# Altium PCB PCB1.PcbDoc
Units mm, origin at the board's own origin, x right, y up, seen from the top; angles counter-clockwise.
Board outline 70 x 70 mm, 2 copper layers (Top Layer, Bottom Layer); 15 components, 11 nets, 44 pads, 21 vias.
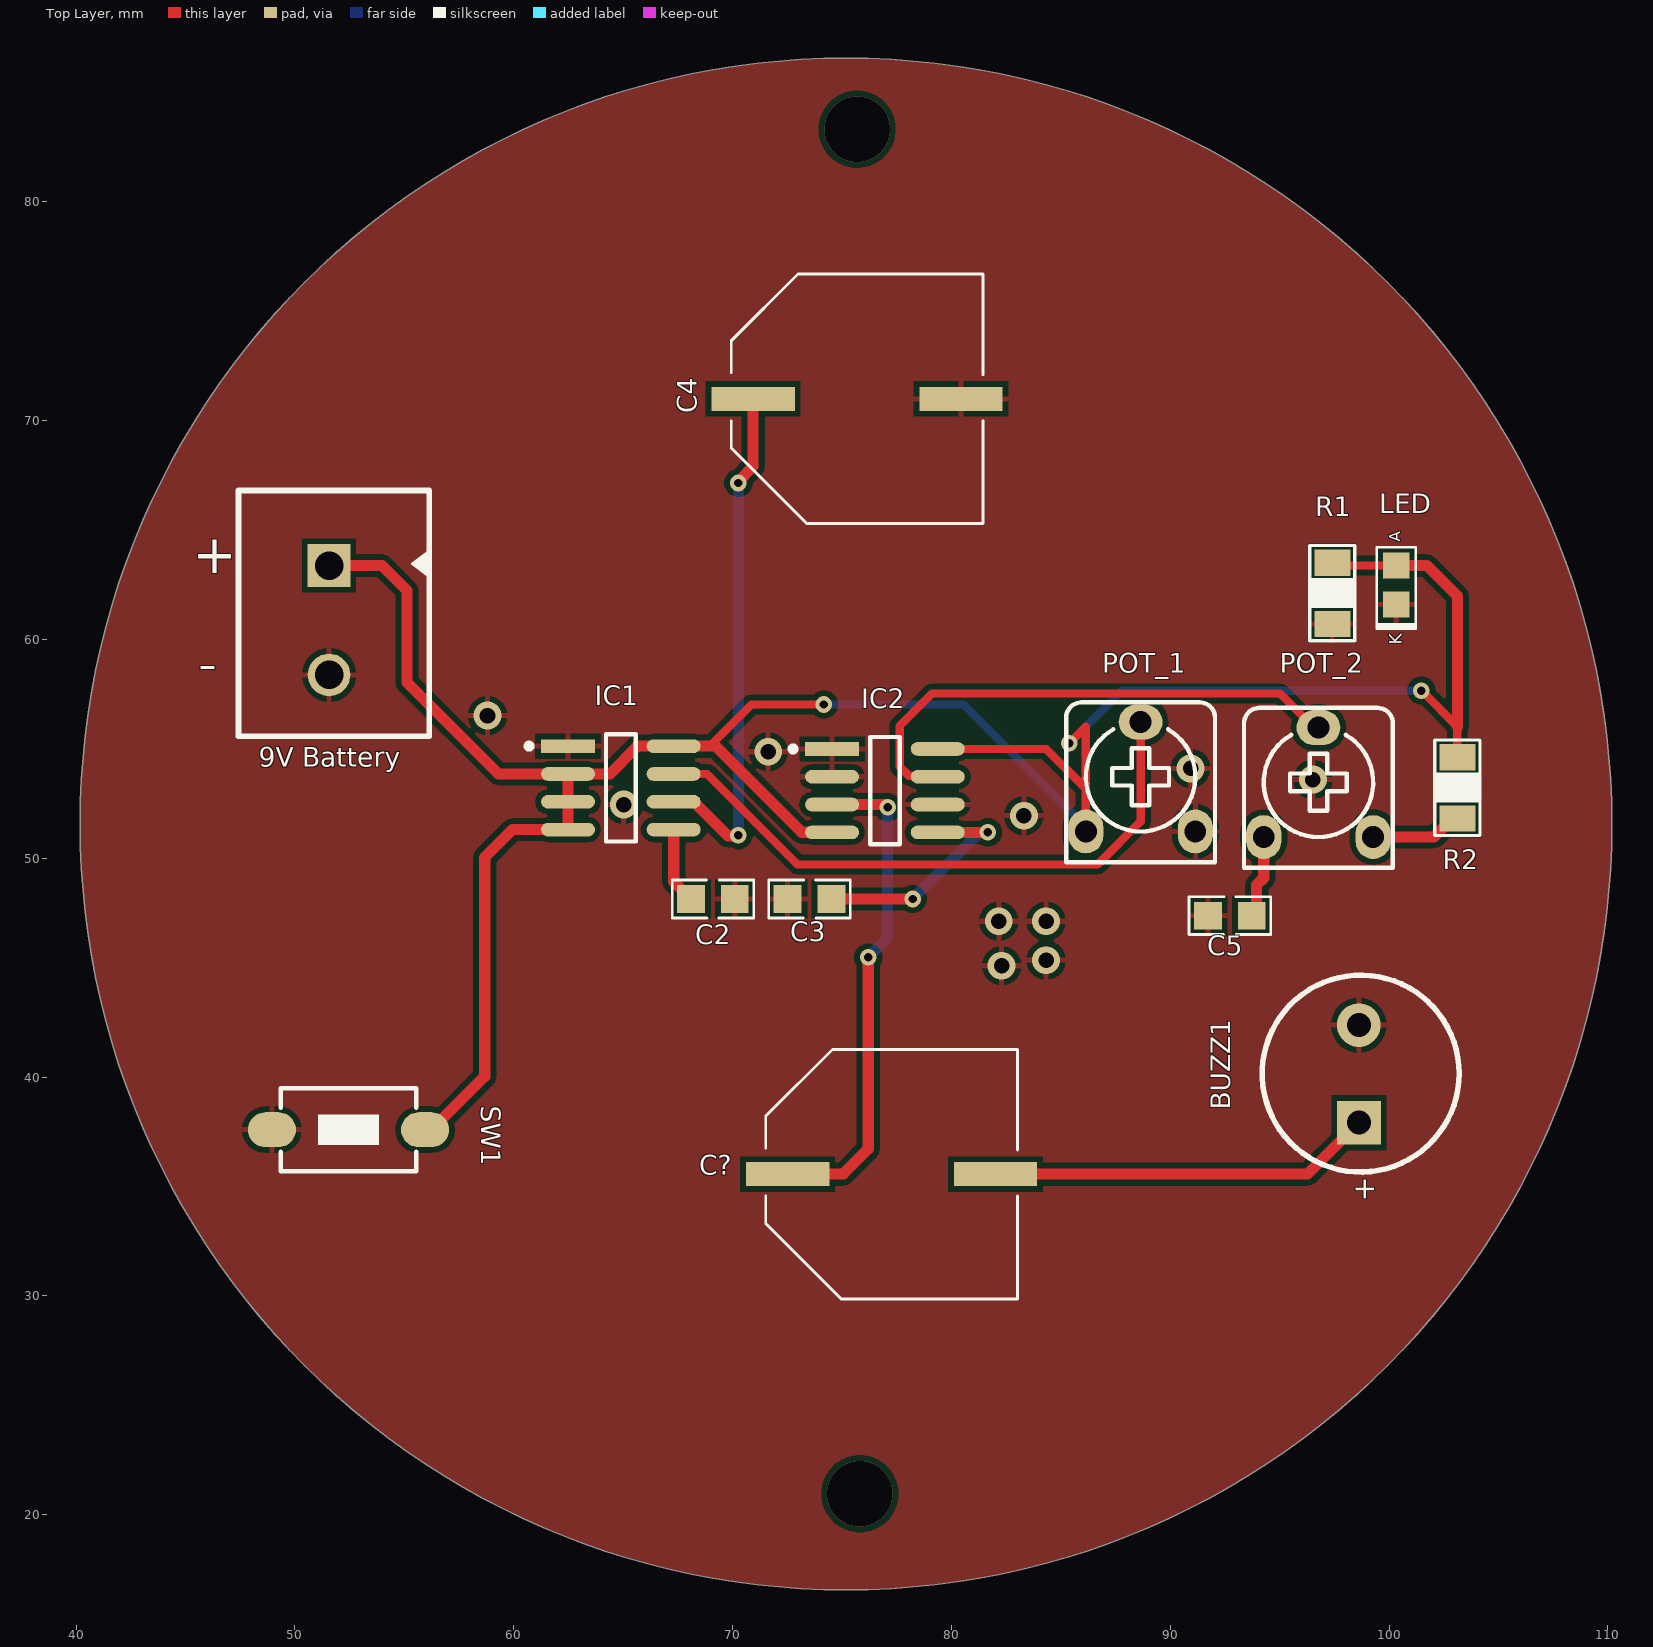
[diagram p0: Top Layer view]
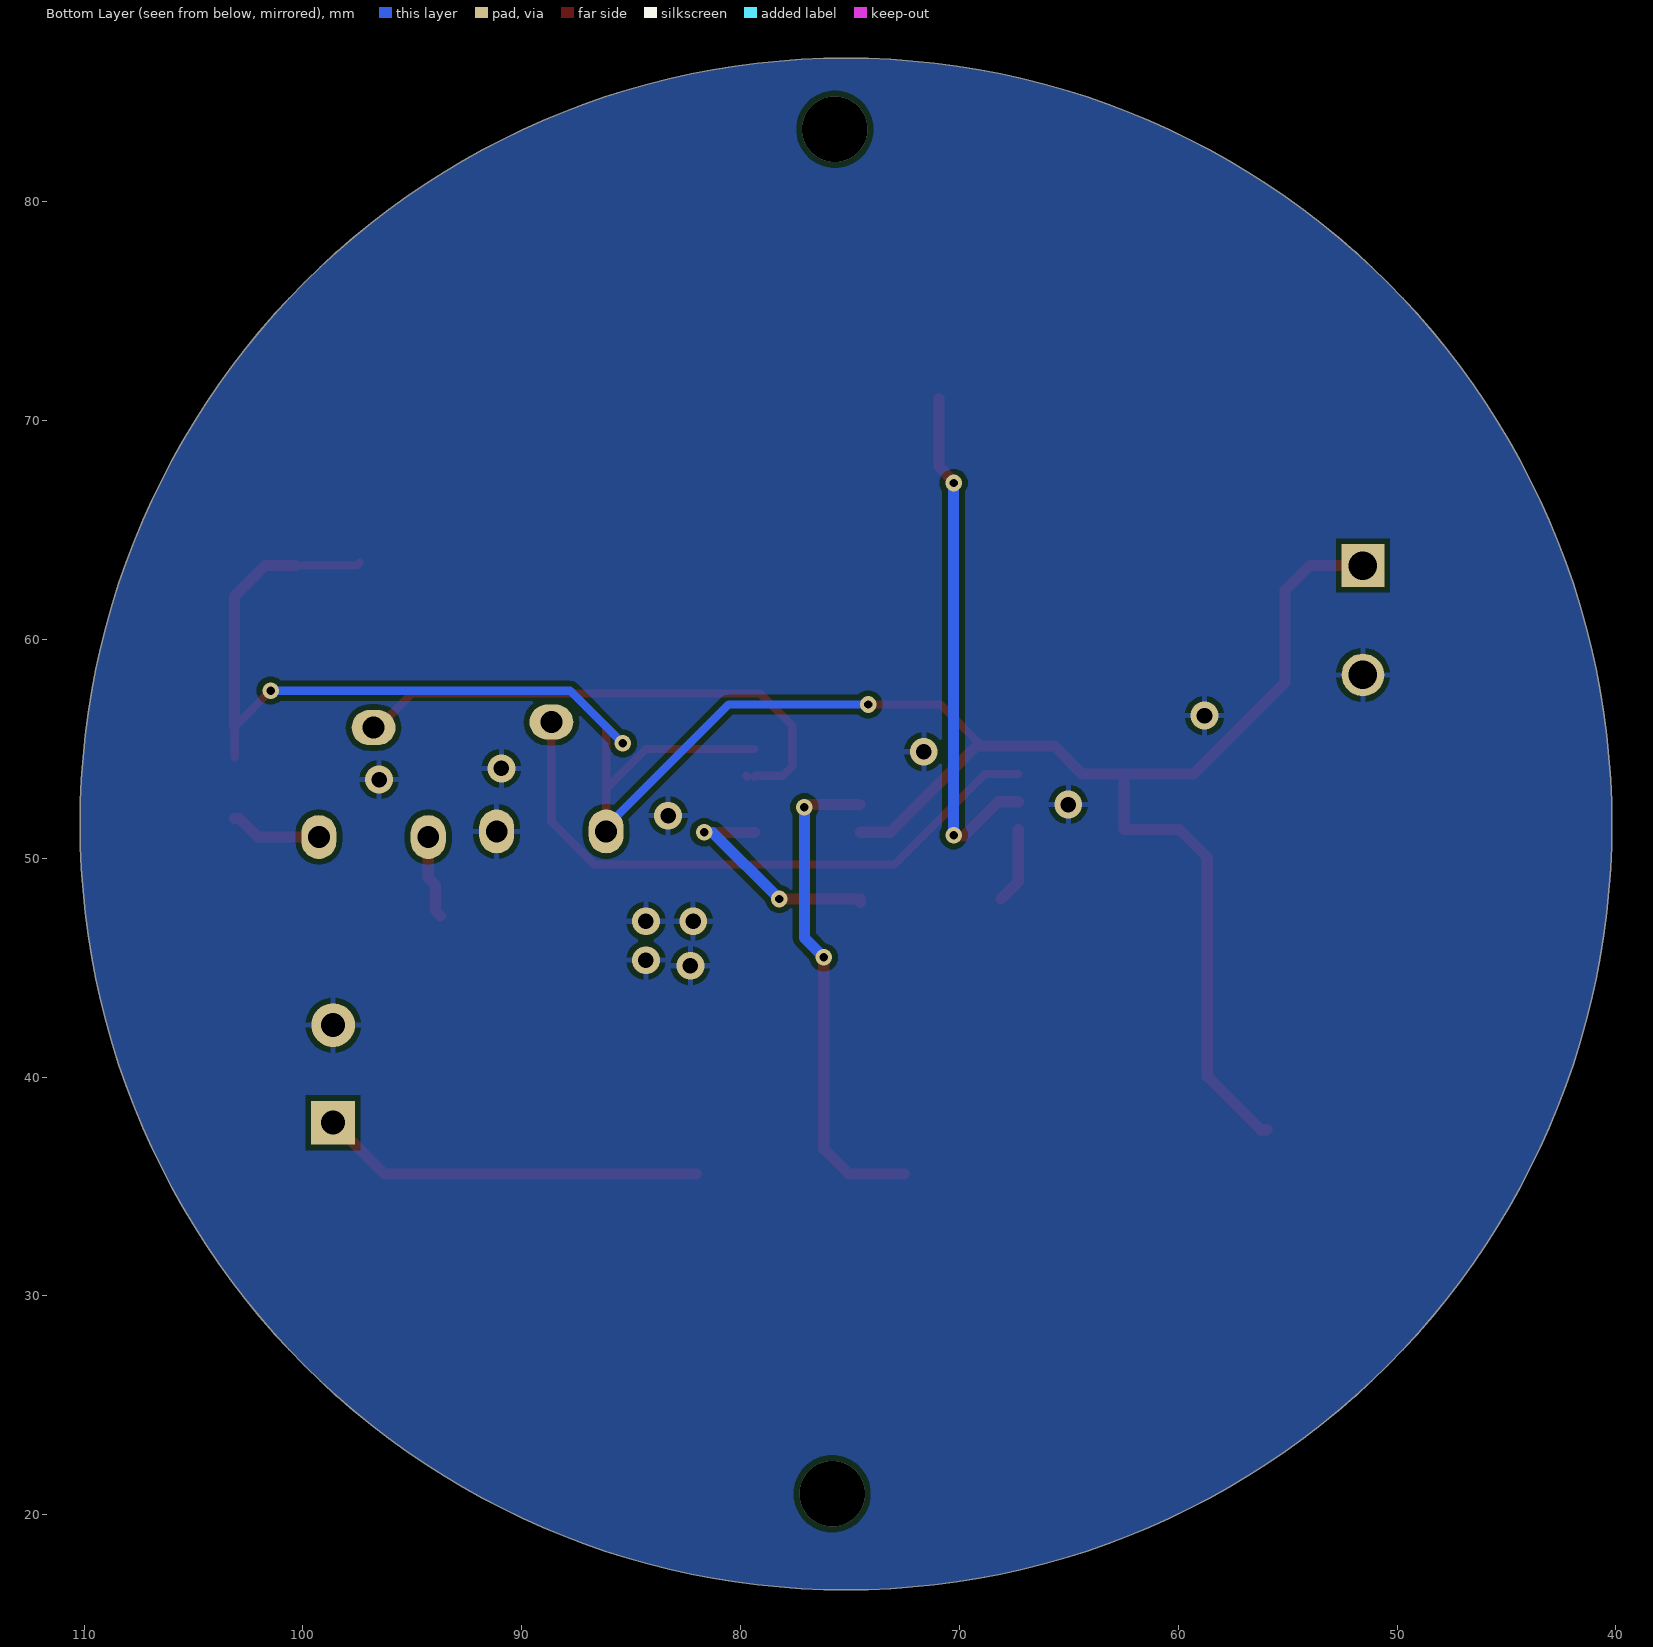
[diagram p1: Bottom Layer view, seen from below]
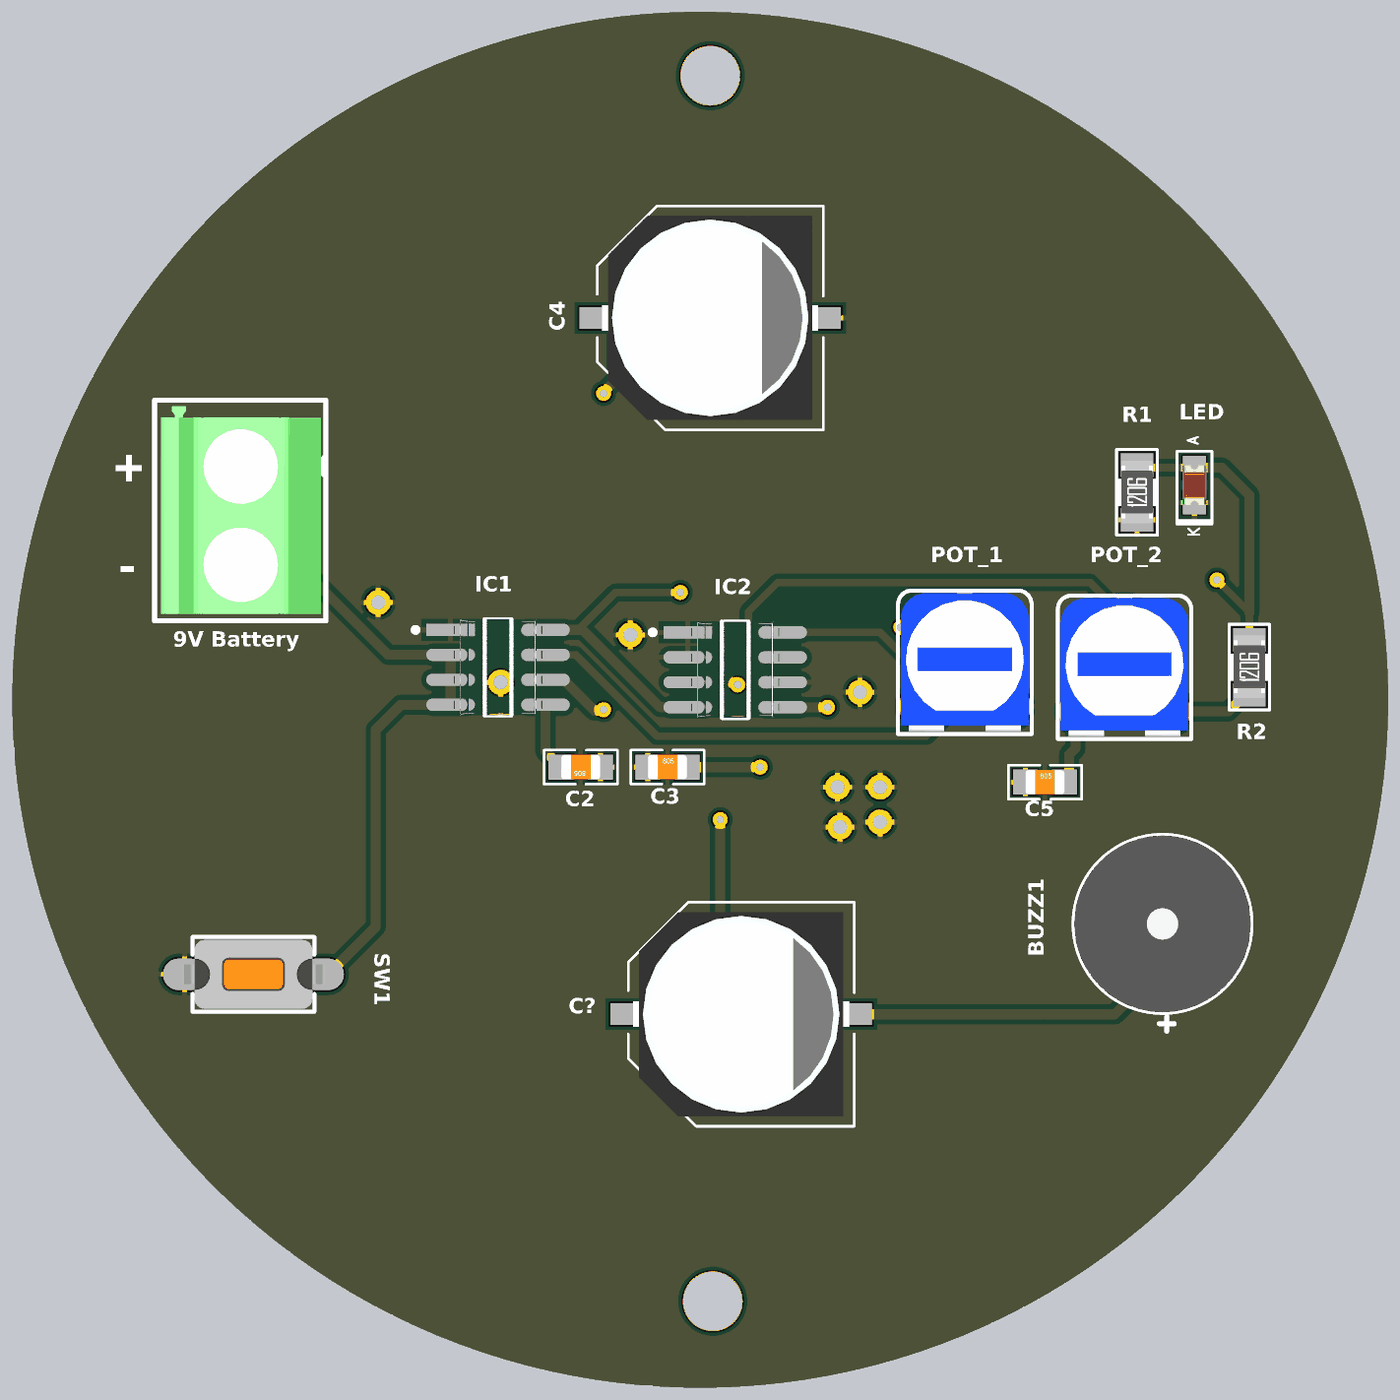
[diagram p2: 3D render of the assembled board from above, using the file's embedded part models]

## Layer stack, top to bottom
Top Solder: solder mask 0.0102, Solder Resist, Dk 3.5
Top Layer: signal copper 0.0356
Dielectric 1: dielectric 0.32, FR-4, Dk 4.8
Bottom Layer: signal copper 0.0356
Bottom Solder: solder mask 0.0102, Solder Resist, Dk 3.5

## Board outline
40.184,51.562 ccw(c75.184,51.562) 75.184,16.562 ccw(c75.184,51.562) 110.184,51.562 ccw(c75.184,51.562) 75.184,86.562 ccw(c75.184,51.562)

## Design rules (kind name [scope] priority, off if disabled: settings)
Clearance [All] p1: gap=0.254 ignorepadtopadclearanceinfootprint=TRUE
Height [All] p1: minheight=0 maxheight=1000 prefheight=1
PolygonConnect [All] p1: connectstyle=Relief reliefconductorwidth=0.254 reliefentries=4 polygonreliefangle="90 Angle" airgapwidth=0.254
RoutingVias [All] p1: holewidth=0.635 width=1.27 viastyle="Through Hole" minholewidth=0.381 minwidth=0.762 maxholewidth=7.62 maxwidth=7.62
SolderMaskExpansion [All] p1: expansion=0.102 istentingtop=FALSE
Width [All] p1: maxlimit=1.27 minlimit=0.254 preferedwidth=0.254
29 further rules are at their usual default settings.

## Components (designator, comment, footprint, x,y, rotation, side; value= is the part's Value field where it differs from the comment)
"9V Battery" "TERMINAL BLOCK 2 PIN" CON2_P196_1729128_TH_ST 51.562,63.373 r270 top (schematic designator J1)
BUZZ1 "BZ 3V" BUZ_9MM 98.679,40.132 r90 top
C2 "0.1uF" CAP_0805 69.104,48.133 r180 top
C3 "0.01uF" CAP_0805 73.517,48.133 r0 top
C4 "100uF" ACAP_P305_D393_H393_RAD 75.692,70.993 r0 top
C5 "0.01uF" CAP_0805 92.726,47.371 r0 top
C? "100uF" ACAP_P305_D393_H393_RAD 77.267,35.56 r0 top
IC1 "NE555DR" FP-D0008A-IPC_A 64.896,53.213 r0 top (schematic designator U1)
IC2 "NE555DR" FP-D0008A-IPC_A 76.963,53.086 r0 top (schematic designator U2)
LED "GREEN LED" LED_0805 100.33,62.484 r90 top (schematic designator DS1)
POT_1 "10K" "POT TH 7X5" 88.646,53.721 r0 top (schematic designator P1)
POT_2 "10K" "POT TH 7X5" 96.774,53.467 r0 top (schematic designator P2)
R1 "10K" "RES 1206_3216" 97.409,62.106 r90 top value=1K
R2 "1K" "RES 1206_3216" 103.124,53.216 r90 top
SW1 "Tactile 2PIN 6X3.5mm H4.57mm (SMD)" SWPBS_SPST_6X3X5 52.451,37.592 r0 top

## Footprints (in the part's own frame and the unit in brackets; to place one, negate y for a bottom-side part, rotate by r counter-clockwise, add the part's x,y. Pads: shape width x height; smd on the part's side, far side on the other; paste and mask are expansions set on the pad)
ACAP_P305_D393_H393_RAD [mm] "Aluminium Capacitor"
  rect 3.81x1.1 smd: 1(-4.75,0) 2(4.75,0)
  silkscreen extent -5.75,-5.7 5.75,5.7, body extent -5.5,-5.2 5.5,5.2, height 10.41
BUZ_9MM [mm]
  rect 2x2 hole 1.1: 1(-2.22,0.05)
  round 2 hole 1.1: 2(2.24,0.06)
  silkscreen extent -4.47,-4.53 4.52,4.47, body extent -4.47,-4.53 4.53,4.47, height 4.8
CAP_0805 [mm] "Ceramic Capacitor"
  rect 1.27x1.27 smd mask+0.076: 1(-1,0) 2(1,0)
  silkscreen extent -1.86,-0.86 1.86,0.86, body extent -1,-0.62 1,0.63, height 0.78
CON2_P196_1729128_TH_ST [mm] "Terminal Block"
  rect 1.95x1.95 / inner round 1.95 / far side rect 1.95x1.95 hole 1.3: 1(0,0)
  round 1.95 hole 1.3: 2(5,0)
  silkscreen extent -3.43,-4.14 7.8,4.57, body extent -3.13,-3.83 7.44,4.32, height 10.51
FP-D0008A-IPC_A [mm]
  rect 2.469x0.622 smd paste+0 mask+0: 1(-2.414,1.905)
  rrect100% 2.469x0.622 smd paste+0 mask+0: 2(-2.414,0.635) 3(-2.414,-0.635) 4(-2.414,-1.905) 5(2.414,-1.905) 6(2.414,-0.635) 7(2.414,0.635) 8(2.414,1.905)
  silkscreen extent -4.32,-2.45 0.68,2.45, body extent -4.15,-2.95 4.15,2.95, height 0.25
LED_0805 [mm] "LED"
  rect 1.2x1.2 smd mask+0.076: A(0.889,0) K(-0.889,0)
  silkscreen extent -1.99,-0.89 1.73,0.89, body extent -1.01,-0.62 1.01,0.63, height 1.1
"POT TH 7X5" [mm] "POT, TRIM, 7.5X5.0mm, pitch: 5.0mm"
  oval 1.6x2 hole 1: 1(-2.5,-2.5) 3(2.5,-2.5)
  oval 2x1.6 hole 1: 2(0,2.5)
  silkscreen extent -3.4,-3.9 3.4,3.4, body extent -3.25,-3.78 3.25,3.27, height 7
"RES 1206_3216" [mm] "Chip Resistor, 2-Leads, Body 3.13x1.55mm, IPC Medium Density"
  rect 1.2x1.65 smd: 1(-1.4,0) 2(1.4,0)
  Top Layer pour cut-out: -0.73,0.9 -0.72,0.91 0.71,0.91 0.71,-0.87 0.7,-0.88 -0.73,-0.88
  silkscreen extent -2.17,-1.03 2.19,1.04, body extent -1.57,-0.8 1.62,0.8, height 0.6
SWPBS_SPST_6X3X5 [mm] "SWITCH, PUSHBUTTON, SMD, SPST, 6X3.5mm, SKQMBBE010, 50000 Cycles, 1.57N Force"
  oval 2.2x1.6 smd mask+0.1: 1(-3.5,0) 2(3.5,0)
  silkscreen extent -3.1,-1.9 3.1,1.9, body extent -3.65,-1.75 3.65,1.75, height 5

## Part data
"9V Battery": library part CON-TB_2X1-196-ST-TH, "2 Pins, 1 Row 5mm Pitch, straight Connector, male", Alternate Part Number-1=NA, Case/Package=TH-CON, Manufacturer="Phoenix Contact", Manufacturer Part Number=MKDSN1,5/2, Supplier Part Number-1=MKDSN1,5/2, Supplier-1="SP ROAD"
BUZZ1: library part "Buzzer 3V 9mm (THD)", "Buzzers Transducer, Externally Driven Magnetic 3V 80mA 2.73kHz 85dB @ 3V, 10cm Through Hole PC Pins", PartNumber=CST-931AP
C2 C3 C5: library part CAP_2.2nF-50V-10%-0805, "2200pF ±10% 50V Ceramic Capacitor C0G, NP0 0805 (2012 Metric)", Alternate Part Number-1=NA, Case/Package=0805, Manufacturer=KEMET, Manufacturer Part Number=C0805C222K5GEC7800, Supplier Part Number-1=0805N222J500LT, Supplier-1=SIRICOM
C4 C?: library part CAP-P_100uF-50V-20%-RAD, "100µF 50V Aluminum Polymer Capacitor Radial, Can - SMD 28mOhm 4000 Hrs @ 125°C", Alternate Part Number-1=VEU101M1HTR-1010, Case/Package=Radial-SMD, Manufacturer=Nichicon, Manufacturer Part Number=GYA1H101MCQ1GS, Supplier Part Number-1=GYA1H101MCQ1GS, Supplier-1="SP ROAD"
IC1 IC2: library part CMP-1685-00007-2, "IC OSC SGL TIMER 100KHZ 8-SOIC", Case/Package=SOIC, Frequency=100kHz, High Level Output Current=-200mA, Low Level Output Current=200mA, Max Operating Temperature=70°C, Max Supply Voltage=16V, Min Operating Temperature=0°C, Min Supply Voltage=4.5V, Operating Supply Current=10mA, Package Quantity=2500, Quiescent Current=15mA, Contact Plating=Gold, Height=1.58mm, Lead Free="Lead Free", Length=4.9mm, Mount="Surface Mount", Number of Pins=8, Number of Timers/Counters=1, Packaging="Tape and Reel", Radiation Hardening=No, REACH SVHC="No SVHC", Weight=0.002561oz, Width=3.91mm
LED: library part LED_GREEN-2.2-20mA-0805, "Green 569nm LED Indication - Discrete 2.1V 0805 (2012 Metric)", Alternate Part Number-1=NA, Case/Package=0805, Manufacturer="Vishay Lite-On", Manufacturer Part Number=LTST-C171GKT, Supplier Part Number-1=LTST-C171GKT, Supplier-1="SP ROAD"
POT_1 POT_2: library part "Pot 7X5mm (THD)"
R1 R2: library part "Res 1206", "SMT Resistor"
SW1: "Tactile Switch SPST-NO Top Actuated Surface Mount", PartNumber=FSMSMTR-ND

## Via types
v1: diameter 1.27, hole 0.711, Top Layer to Bottom Layer, 10 vias
v2: diameter 0.762, hole 0.381, Top Layer to Bottom Layer, 9 vias
v3: diameter 3, hole 3, Top Layer to Bottom Layer, 2 vias

## Nets (pads, with @x,y where several pads share a name; then routed paths per layer and width w, separated by ;. In a path a pad name is that pad's centre, name@x,y a point inside that pad or via, vN(x,y) a via of type N, cw(c..) or ccw(c..) an arc to the next point about the centre after c; other vN are vias at no path point)
9V: "9V Battery.1" IC1.2 IC1.3 IC1.4 IC1.8 IC2.4 IC2.8 LED.A POT_1.1 R1.2 R2.2 SW1.2 | length 119.2
  Top Layer w0.381: 68.961,55.118 70.866,57.023 v2(74.168,57.023) ; IC2.8 84.328,54.991 86.146,53.173 ; v2(85.384,55.245) 86.146,56.007 86.146,53.173 ; POT_1.1 86.146,53.173 ; R1.2 97.542,63.373 LED.A ; v2(101.473,57.658) 103.124,56.007 R2.2
  Top Layer w0.508: 51.562,63.373 53.975,63.373 55.118,62.23 55.118,58.039 59.309,53.848 IC1.2 ; SW1.2 56.251,37.592 58.674,40.015 58.674,50.038 59.944,51.308 IC1.4 IC1.3 IC1.2 ; IC2.4 74.543,51.187 73.146,51.187 69.215,55.118 IC1.8 65.659,55.118 64.389,53.848 IC1.2 ; LED.A 101.727,63.373 103.124,61.976 103.124,56.007
  Bottom Layer w0.381: v2(74.168,57.023) 80.544,57.023 86.146,51.421 POT_1.1 ; v2(85.384,55.245) 87.797,57.658 v2(101.473,57.658)
GND: "9V Battery.2" BUZZ1.2 C2.1 C3.1 C4.2 C5.1 IC1.1 IC2.1 IC2.2 IC2.6 LED.K POT_1.3 R1.1 SW1.1
  other v1: 82.296,45.085 84.328,45.339 82.169,47.117 84.328,47.117 83.312,51.943 65.024,52.451 96.52,53.594 90.932,54.102 71.628,54.864 58.801,56.515
NetBUZZ1_1: BUZZ1.1 C?.2 | length 17.6
  Top Layer w0.508: C?.2 96.277,35.56 BUZZ1.1
NetC?_1: C?.1 IC2.3 | length 22.7
  Top Layer w0.508: C?.1 75.057,35.56 76.2,36.703 v2(76.2,45.466) ; IC2.3 76.893,52.451 77.02,52.324 v2(77.089,52.324)
  Bottom Layer w0.508: v2(76.2,45.466) 77.089,46.355 v2(77.089,52.324)
NetLabel219: C5.2 POT_2.1 | length 3.8
  Top Layer w0.508: C5.2 93.951,47.596 93.951,48.768 94.274,49.091 POT_2.1
NetLabel220: C3.2 IC2.5 | length 10.9
  Top Layer w0.508: C3.2 74.517,47.974 74.676,48.133 v2(78.232,48.133) ; IC2.5 v2(81.661,51.181)
  Bottom Layer w0.508: v2(78.232,48.133) 81.28,51.181 v2(81.661,51.181)
NetLabel221: C2.2 IC1.5 | length 3.5
  Top Layer w0.508: IC1.5 67.31,48.927 C2.2
NetP2_2: IC2.7 POT_2.2 | length 24.3
  Top Layer w0.381: IC2.7 79.33,53.767 78.059,53.767 77.634,54.192 77.634,56.044 79.119,57.529 95.012,57.529 96.574,55.967 POT_2.2 ; IC2.7@79.703,53.721 IC2.7@79.756,53.774
NetP2_3: POT_2.3 R2.1 | length 4.2
  Top Layer w0.508: POT_2.3 102.05,50.967 102.899,51.816 R2.1
thres: C4.1 IC1.6 | length 23.8
  Top Layer w0.508: IC1.6 68.234,52.578 69.801,51.01 70.222,51.01 v2(70.266,51.054) ; v2(70.266,67.148) 70.266,67.217 70.942,67.894 C4.1
  Bottom Layer w0.508: v2(70.266,51.054) v2(70.266,67.148)
y: IC1.7 POT_1.2 | length 28.4
  Top Layer w0.381: IC1.7 68.834,53.848 72.969,49.713 86.688,49.713 88.646,51.671 POT_1.2
copper on no net:
  other v3: 75.819,20.955 75.692,83.312

## Polygon pours and split planes (outlines as drawn)
GND on Bottom Layer "GND_L02_P001" (solid, remove dead copper, pour order 1): 40.184,51.562 ccw(c75.184,51.562) 75.184,16.562 ccw(c75.184,51.562) 110.184,51.562 ccw(c75.184,51.562) 75.184,86.562 ccw(c75.184,51.562)
GND on Top Layer "GND_L01_P000" (solid, remove dead copper, pour order 0): 40.184,51.562 ccw(c75.184,51.562) 75.184,16.562 ccw(c75.184,51.562) 110.184,51.562 ccw(c75.184,51.562) 75.184,86.562 ccw(c75.184,51.562)

## Silkscreen, mask and mechanical layers (free items; w line width, h text height)
Top Overlay:
  text "+" at 45.339,62.46 h3
  text "-" at 45.593,57.525 h3
Mechanical 1:
  circle w1.2: c75.184,51.562 r35

## Text inside footprints (layer, text, board x,y; h text height)
BUZZ1: Top Overlay "+" at 99.314,34.29 h1 r90
LED: Top Overlay "K" at 100.58,59.759 h0.56 r90; Top Overlay "A" at 100.505,64.471 h0.51 r90